# Altium PCB SCOPE.PcbDoc (part 2 of 4)
Units mil, origin at the board's own origin, x right, y up, seen from the top; angles counter-clockwise.
Board outline 7710 x 4000 mil, 2 copper layers (Top Layer, Bottom Layer); 219 components, 350 nets, 1637 pads, 359 vias.
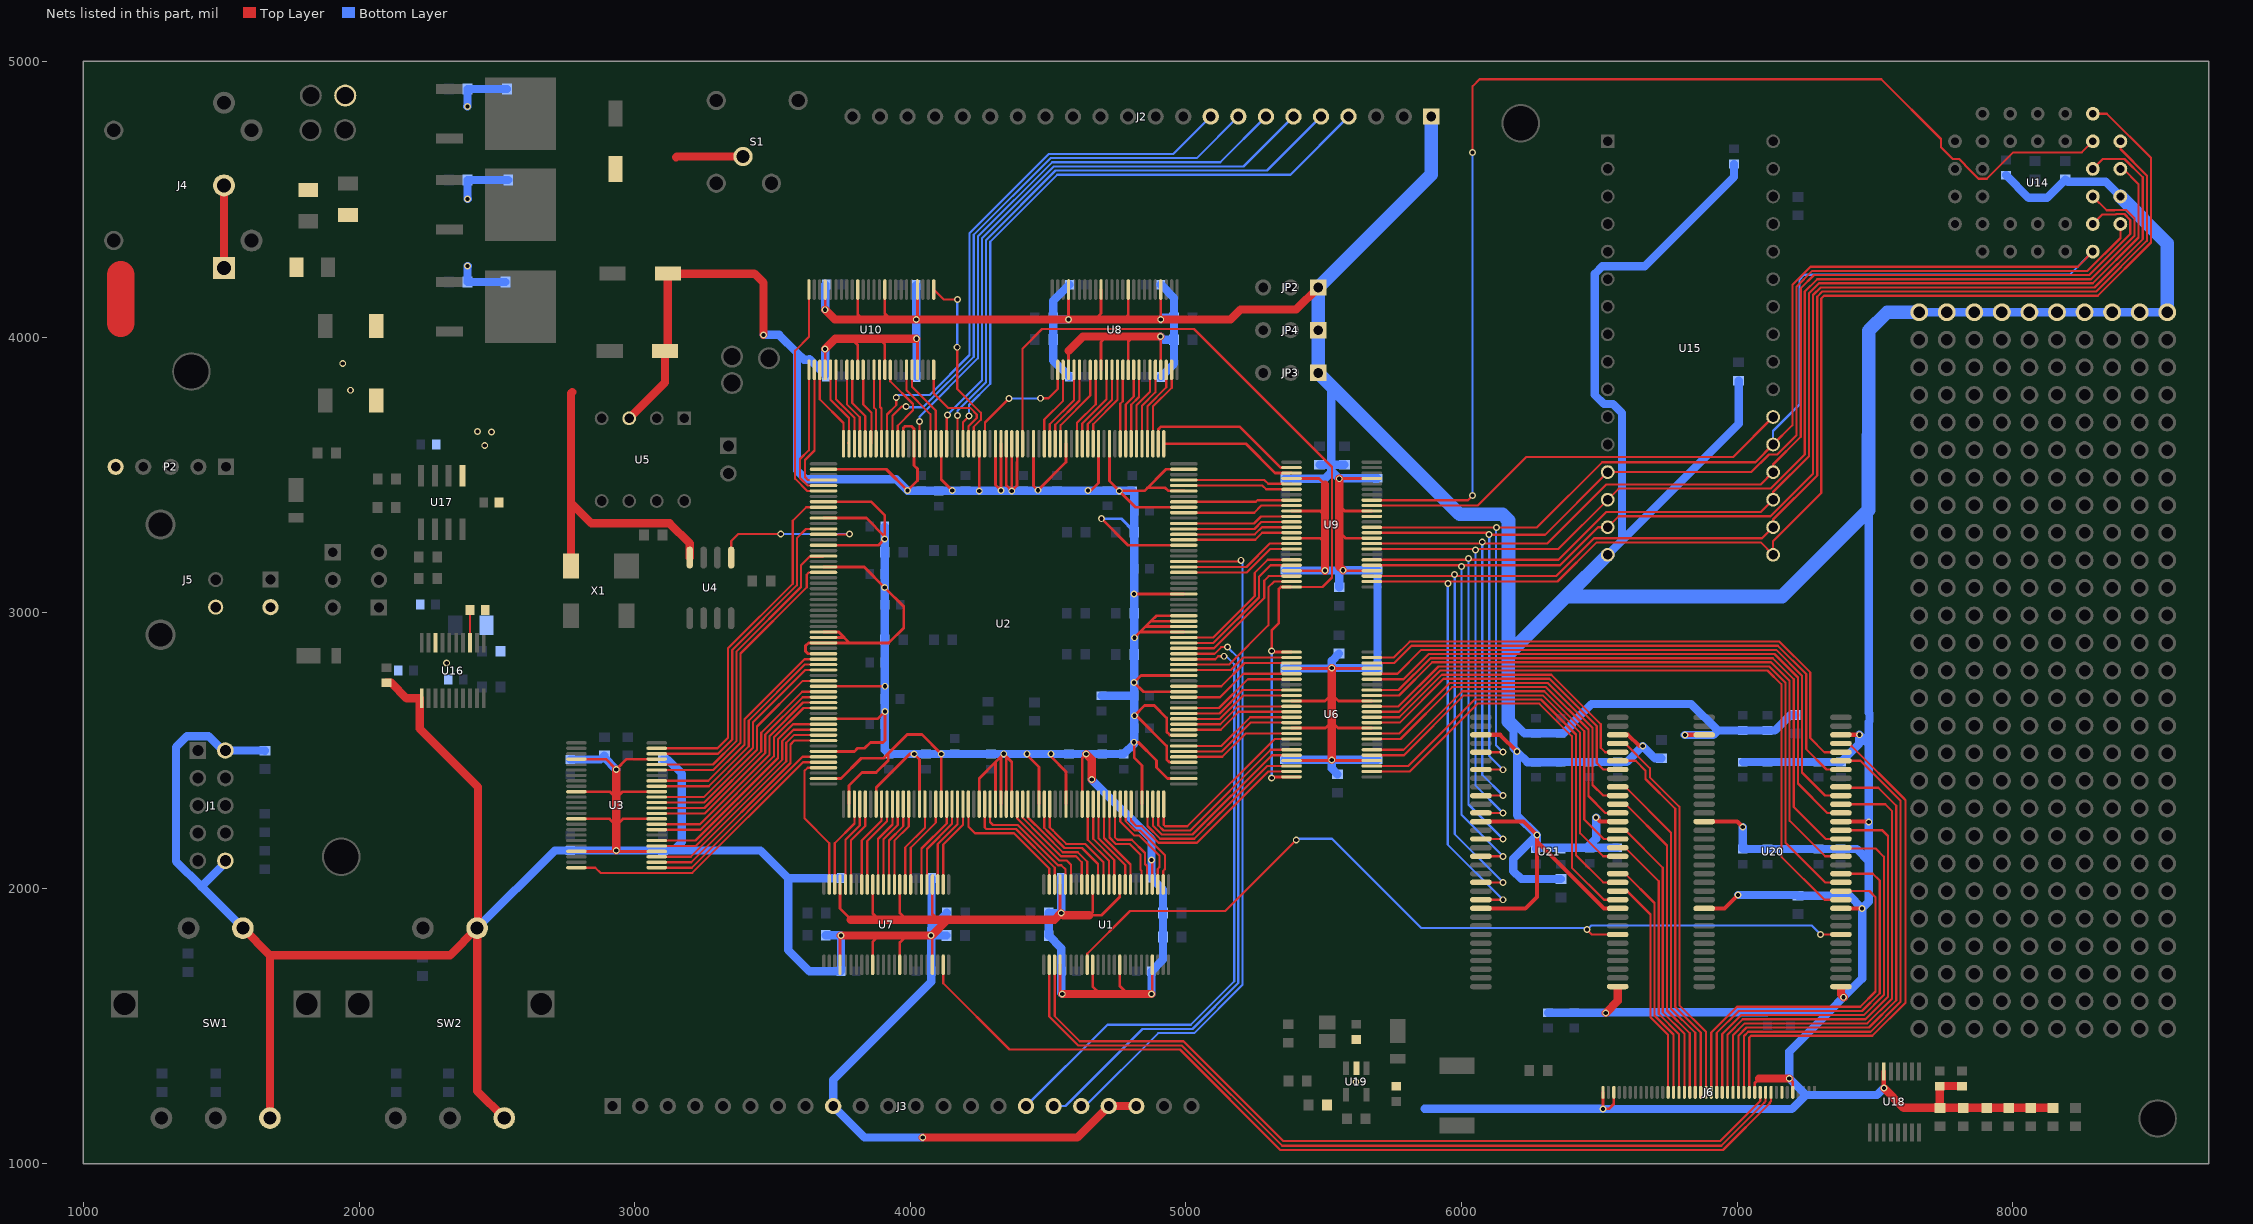
[diagram p2: the nets of this part, all layers, seen from the top]

## Via types
v1: diameter 25, hole 15, Top Layer to Bottom Layer, 359 vias

## Nets (pads, with @x,y where several pads share a name; then routed paths per layer and width w, separated by ;. In a path a pad name is that pad's centre, name@x,y a point inside that pad or via, vN(x,y) a via of type N, cw(c..) or ccw(c..) an arc to the next point about the centre after c; other vN are vias at no path point) (continued)
AGND: C1.2 C2.2 C3.2 C4.2 C5.2 C6.2 C7.2 C8.2 C9.2 C10.2 C11.2 C12.2 C13.2 C14.2 C15.2 C16.2 C17.2 C18.2 C19.2 C20.2 C21.2 C22.2 C23.2 C24.2 C25.2 C26.2 C27.2 C28.2 C29.2 C30.2 C31.2 C32.2 C33.2 C34.2 C35.2 C36.2 C37.2 C38.2 C39.2 C40.2 C41.2 C42.2 C43.2 C44.2 C45.2 C46.2 C47.2 C48.2 C49.2 C50.2 C51.2 C52.2 C53.2 C54.2 C55.2 C56.2 C57.2 C58.2 C59.2 C60.2 C61.2 C62.2 C63.2 C64.1 C65.1 C66.2 C67.2 C68.2 C70.2 C71.2 C72.2 C73.2 C74.2 C75.2 C76.2 C77.2 C78.2 C79.2 C80.2 C81.2 C82.2 C83.2 C84.2 C85.2 C86.2 C87.2 C88.2 C89.2 C90.2 C91.2 C92.2 C93.2 C94.2 C95.2 C96.2 C97.2 C98.2 C99.1 C100.2 J1.2 J1.10 J2.1 J3.9 J3.19 J3.20 J4.1 J4.3 J5.2 J6.1 J6.3 J6.29 J6.36 JP2.1 JP3.1 JP4.1 P1.2 P2.5 pad.0@7660,4090 pad.0@7760,4090 pad.0@7860,4090 pad.0@7960,4090 pad.0@8060,4090 pad.0@8160,4090 pad.0@8260,4090 pad.0@8360,4090 pad.0@8460,4090 pad.0@8560,4090 pad.1@1950,4876 pad.EndPad pad.StartPad R3.2 R4.2 R5.2 R6.2 R9.1 R12.2 R16.1 R18.1 R19.2 R20.2 R22.2 R23.2 R24.2 R25.2 R26.2 R27.2 R28.2 R29.2 R30.2 R31.1 R33.1 R34.1 R37.1 R46.1 R47.1 R48.1 R49.1 R50.2 R51.2 R60.1 R62.1 R63.1 R64.1 R65.1 R67.1 R68.1 R69.1 R70.2 R71.2 R72.2 R73.1 R74.2 R75.1 S1.3 SW1.2 SW1.5 SW2.2 SW2.5 U1.4 U1.10 U1.15 U1.21 U1.28 U1.34 U1.39 U1.45 U2.2 U2.8 U2.11 U2.16 U2.20 U2.32 U2.33 U2.34 U2.36 U2.42 U2.48 U2.54 U2.59 U2.62 U2.67 U2.75 U2.79 U2.86 U2.89 U2.90 U2.91 U2.92 U2.97 U2.102 U2.105 U2.116 U2.122 U2.125 U2.130 U2.138 U2.141 U2.149 U2.150 U2.151 U2.152 U2.156 U2.165 U2.172 U2.175 U2.179 U2.191 U2.193 U2.199 U2.205 U2.208 U2.209 U2.210 U2.211 U2.212 U2.215 U2.222 U2.227 U2.229 U3.4 U3.10 U3.15 U3.21 U3.28 U3.34 U3.39 U3.45 U4.4 U5.3 U6.4 U6.10 U6.15 U6.21 U6.28 U6.34 U6.39 U6.45 U7.4 U7.10 U7.15 U7.21 U7.28 U7.34 U7.39 U7.45 U8.4 U8.10 U8.15 U8.21 U8.28 U8.34 U8.39 U8.45 U9.4 U9.10 U9.15 U9.21 U9.28 U9.34 U9.39 U9.45 U10.4 U10.10 U10.15 U10.21 U10.28 U10.34 U10.39 U10.45 U14.16 U15.16 U16.1 U16.18 U17.5 U18.6 U19.2 U20.3 U20.13 U20.23 U20.33 U20.42 U20.52 U20.62 U21.3 U21.13 U21.23 U21.33 U21.42 U21.52 U21.62 X1.2 | length 70654.8
  Top Layer w10: U3.45@2788.66,2134.05 U3.4@3080,2134.05 ; U3.39@2788.66,2252.16 2908.84,2252.16 2933,2228 2957.16,2252.16 U3.10@3080,2252.16 ; U3.34@2788.66,2350.59 2909.41,2350.59 2933,2327 2956.59,2350.59 U3.15@3080,2350.59 ; U3.28@2788.66,2468.7 2895.3,2468.7 v1(2933,2431) 2970.7,2468.7 U3.21@3080,2468.7 ; U2.59@3685,2398.27 3748.27,2398.27 3822,2472 3903,2472 3989,2558 4042,2558 v1(4112.17,2487.83) U2.79@4112.17,2305.75 ; U2.54@3685,2496.69 3797.74,2496.69 3809.04,2508 3834.35,2508 3855.35,2529 3900,2529 3908,2537 v1(3908,2642) 3880.8,2614.8 U2.48@3685,2614.8 ; U2.42@3685,2732.91 v1(3907.91,2732.91) ; U2.36@3685,2851.02 3628.98,2851.02 3620,2860 3620,2880 3630.39,2890.39 U2.34@3685,2890.39 3779.61,2890.39 ; U2.33@3685,2910.08 3759.92,2910.08 ; U2.32@3685,2929.76 3740.24,2929.76 3779.61,2890.39 ; U2.20@3685,3165.98 3833.02,3165.98 v1(3907,3092) 3976,3023 3976,2945 3921.39,2890.39 3779.61,2890.39 ; U2.16@3685,3244.72 3884.72,3244.72 v1(3907,3267) ; U2.11@3685,3343.15 3840.85,3343.15 3907,3277 v1(3907,3267) ; U2.8@3685,3402.2 3858.44,3402.2 3907,3353.65 v1(3907,3267) ; U2.2@3685,3520.32 3912.68,3520.32 v1(3990,3443) 4026,3479 4026,3522 4013.74,3534.26 U2.227@4013.74,3612.83 4013.74,3667.26 4005,3676 3981,3676 3974.37,3669.37 U2.229@3974.37,3612.83 ; U10.4@3691,3881 v1(3691,3957) ; v1@3691.05,4099.06 U10.45@3691.05,4172.34 ; U7.28@3745.3,1722.66 v1@3745.3,1829 ; U7.21@3745.3,2014 3745.3,1926.7 3785,1887 ; U2.62@3777.52,2305.75 3777.52,2372.52 3825,2420 3876,2420 3920,2464 3920,2489 ; 3787,3994 3809.16,3971.84 U10.10@3809.16,3881 ; 3809.16,4082.16 U10.39@3809.16,4172.34 ; 3809.84,4082.16 3828,4064 ; U7.34@3863.41,1722.66 3863.41,1805.41 3886.5,1828.5 ; U7.15@3863.41,2014 3863.41,1909.59 3886.5,1886.5 ; U2.67@3875.95,2305.75 3875.95,2364.95 3998,2487 v1(4014,2487) 4033.43,2467.57 U2.75@4033.43,2305.75 ; 3887,3994 3907.59,3973.41 U10.15@3907.59,3881 ; U10.34@3907.59,4172.34 3907.59,4084.41 3928,4064 ; U7.39@3961.84,1722.66 3961.84,1803.84 3987,1829 ; U7.10@3961.84,2014 3961.84,1910.16 3986,1886 ; v1(4022,3994) 4025.7,3990.3 U10.21@4025.7,3881 ; v1@4023,4064 4025.7,4066.7 U10.28@4025.7,4172.34 ; v1(4075.56,1829) 4079.95,1824.61 U7.45@4079.95,1722.66 ; U7.4@4079.95,2014 4079.95,1907.06 4101,1886 ; U2.222@4112.17,3612.83 4112.17,3482.83 v1(4152,3443) ; U2.86@4249.96,2305.75 4249.96,2398.96 4309.02,2458.02 ; v1(4249.96,3442.04) U2.215@4249.96,3612.83 ; U2.89@4309.02,2305.75 4309.02,2458.02 ; U2.212@4309.02,3612.83 4309.02,3462.98 v1(4328.7,3443.3) U2.211@4328.7,3612.83 ; U2.90@4328.7,2305.75 4328.7,2477 ; U2.91@4348.39,2305.75 4348.39,2478.61 v1(4339,2488) ; U2.210@4348.39,3612.83 4348.39,3461.75 v1(4368.07,3442.07) ; U2.92@4368.07,2305.75 4368.07,2458.93 v1(4339,2488) ; U2.209@4368.07,3612.83 v1(4368.07,3442.07) ; U2.208@4387.76,3612.83 4387.76,3547.77 4387,3547.02 4387,3461 v1(4368.07,3442.07) ; v1@4423.5,2483.5 4466.5,2440.5 U2.97@4466.5,2305.75 ; U2.205@4446.81,3612.83 4446.81,3460.19 v1(4463,3444) 4564.92,3545.92 U2.199@4564.92,3612.83 ; v1(4510,2488) 4510,2478 4564.92,2423.08 U2.102@4564.92,2305.75 ; U1.28@4543.3,1722.66 4543.3,1624.7 v1(4551,1617) ; U1.21@4543.3,2014 4543.3,1914.14 v1(4547.44,1910) ; U8.4@4574.06,3881 4574.06,3950.05 ; 4574.06,4078.95 U8.45@4574.06,4172.34 ; U2.105@4623.98,2305.75 4623.98,2472.98 v1(4638,2487) ; v1(4645,3443) 4655,3443 4683.03,3471.03 U2.193@4683.03,3612.83 ; U1.34@4661.41,1722.66 4661.41,1643.59 4687.5,1617.5 ; U1.15@4661.41,2014 4661.41,1914.41 4649.5,1902.5 4694.5,1902.5 4759.84,1967.84 U1.10@4759.84,2014 ; 4671,4064 4692.16,4085.16 U8.39@4692.16,4172.34 ; U8.10@4692.16,3881 4692.16,3982.16 4712,4002 ; v1(4693,3341) 4789.28,3244.72 U2.165@4992.09,3244.72 ; U2.191@4722.4,3612.83 4722.4,3477.6 v1(4758,3442) ; U1.39@4759.84,1722.66 4759.84,1646.16 4786.5,1619.5 ; 4775,4064 4790.59,4079.59 U8.34@4790.59,4172.34 ; U8.15@4790.59,3881 4790.59,3983.59 4809,4002 ; v1@4812.44,3067.56 U2.156@4992.09,3067.56 ; v1(4813,2909) 4833.76,2929.76 ; U2.116@4840.51,2305.75 4840.51,2445.49 4812,2474 v1(4812,2530) 4827,2530 4893,2464 4893,2438 4932.73,2398.27 U2.122@4992.09,2398.27 ; 4853.45,2949.45 U2.150@4992.09,2949.45 ; v1(4875,2103) 4877.94,2100.05 U1.4@4877.94,2014 ; v1@4877.94,1617 U1.45@4877.94,1722.66 ; U8.21@4908.7,3881 v1@4908.7,4002 ; v1(4908.7,4064) U8.28@4908.7,4172.34 ; U2.125@4992.09,2457.32 4939.68,2457.32 4930,2467 4930,2517 4821,2626 v1(4813,2626) 4850,2663 4884.83,2663 4930.09,2617.75 4930.09,2568.02 4942.36,2555.75 U2.130@4992.09,2555.75 ; U2.138@4992.09,2713.23 4845.77,2713.23 v1(4812,2747) 4837.28,2772.28 U2.141@4992.09,2772.28 ; U2.149@4992.09,2929.76 4833.76,2929.76 ; U2.151@4992.09,2969.13 4873.13,2969.13 ; U2.152@4992.09,2988.82 4892.82,2988.82 4873.13,2969.13 ; U2.172@4992.09,3382.52 4817.48,3382.52 v1(4758,3442) ; U2.179@4992.09,3520.31 4927.31,3520.31 4849,3442 ; U2.175@4992.51,3442 4936,3442 4925,3453 4860,3453 4849,3442 ; U6.21@5383,2463.3 U6.28@5674.34,2463.3 ; U6.15@5383,2581.41 5506.41,2581.41 5529,2604 5551.59,2581.41 U6.34@5674.34,2581.41 ; U6.10@5383,2679.84 5504.84,2679.84 5529,2704 5553.16,2679.84 U6.39@5674.34,2679.84 ; U6.4@5383,2797.95 v1@5527.94,2797.95 ; U9.21@5383,3152.3 v1@5503.7,3152.3 ; U9.15@5383,3270.41 5485.59,3270.41 5504,3252 ; U9.10@5383,3368.84 5487.16,3368.84 5504,3352 ; U9.4@5383,3486.95 5482.06,3486.95 5504,3465 ; v1@5530.06,2797.95 U6.45@5674.34,2797.95 ; 5556,3293 5578.59,3270.41 U9.34@5674.34,3270.41 ; 5556,3389 5576.16,3368.84 U9.39@5674.34,3368.84 ; v1@5556.94,3486.95 U9.45@5674.34,3486.95 ; v1@5571.7,3152.3 U9.28@5674.34,3152.3 ; v1@6512.99,1199 J6.1@6512.99,1260 ; v1(6513,1200) 6534,1200 6552.36,1218.36 J6.3@6552.36,1260 ; J6.29@7063.47,1260 7063.47,1294.47 7079,1310 ; v1(7188.76,1310) 7201.26,1297.5 J6.36@7201.26,1260 ; 4309.02,2458.02 v1(4339,2488) ; v1(4758,3442) 4849,3442 ; 4833.76,2929.76 4873.13,2969.13
  Top Layer w15: U21.23@6070,1927.09 6231.09,1927.09 6273,1969 6273,2170 ; U21.13@6070,2242.05 6223.95,2242.05 v1(6273,2193) 6273,2170 ; U21.3@6070,2557.01 6139.99,2557.01 v1(6201,2496) ; v1(6488,2257) 6502.95,2242.05 U21.52@6566.06,2242.05 ; U21.42@6566.06,1927.09 6515.91,1927.09 6273,2170 ; U21.62@6566.06,2557.01 6579.99,2557.01 6604,2557 6645,2516 v1(6657,2516) ; v1@6811.01,2557.01 U20.3@6880,2557.01 ; U20.23@6880,1927.09 6954.09,1927.09 v1(7003,1976) ; U20.13@6880,2242.05 6999.95,2242.05 v1(7020,2222) ; U20.42@7376.06,1927.09 v1@7452.91,1927.09 ; U20.52@7376.06,2242.05 v1@7477,2242.05 ; U20.62@7376.06,2557.01 v1(7443,2557) ; v1@7531.61,1275.41 U18.6@7531.61,1336
  Top Layer w30: J4.1@1510,4250 J4.3@1510,4550 ; SW1.5@1578.43,1855.59 1676.85,1757.17 ; SW1.2@1676.85,1166.61 1676.85,1757.17 ; C57.2@2100,2745.44 2117,2745.44 2172.94,2689.5 2220,2689.5 2220,2580 2432,2368 SW2.5@2432,1855.59 ; SW2.2@2526.85,1166.61 2428.43,1265.04 SW2.5@2428.43,1855.59 2330,1757.17 1676.85,1757.17 ; X1.2@2769.21,3170 2769.21,3398 ; 2774,3801 2769.21,3796.21 2769.21,3398 ; v1(2933,2137) 2933,2228 2933,2327 v1(2933,2431) ; U5.3@2980,3705 3110.39,3835.39 C54.2@3110.39,3950 3120.39,3960 C25.2@3120.39,4230 3434,4230 3467,4197 v1(3467,4008) ; 3150,4652 3153,4655 S1.3@3393,4655 ; U4.4@3200,3200 3200,3250.98 3126.98,3324 2843.21,3324 2769.21,3398 ; v1(3691,3957) 3728,3994 3787,3994 3887,3994 v1(4022,3994) ; v1@3691.05,4099.06 v1(3691,4099) 3726,4064 3828,4064 3908,4064 ; v1(3748,1829) 3987,1829 v1(4075.56,1829) 4078,1829 4135,1886 ; 3784,1886 3986,1886 4101,1886 4135,1886 ; 3907.59,4064.41 3908,4064 ; v1@4023,4064 v1(4021.56,4064) 3928,4064 3908,4064 ; v1@4025.7,4064 v1(4574,4064) 4671,4064 4775,4064 v1(4908.7,4064) 5162,4064 5198,4100 5400,4100 JP2.1@5480,4180 ; v1(4045,1096) 4606,1096 J3.19@4720,1210 J3.20@4820,1210 ; v1(4551,1617) v1(4874.56,1617) ; 4574.06,3950.05 4626,4002 4712,4002 4809,4002 v1(4908,4002) ; v1(4638,2487) 4658,2467 v1(4658,2395.44) ; 4649.5,1902.5 4554.94,1902.5 v1(4547.44,1910) 4523.44,1886 4135,1886 ; 5503.59,3270.41 5504,3270 ; v1@5504,3152 v1(5504,3153.44) 5504,3252 5504,3270 ; 5504,3465 5504,3352 5504,3270 ; v1@5527.94,2797.95 v1(5529,2799) ; v1(5529,2466) 5529,2604 5529,2704 v1(5529,2799) ; v1@5530.06,2797.95 v1(5529,2799) ; 5556.84,3368.84 5556,3368 ; v1@5556.94,3486.95 v1(5556,3486) 5556,3389 5556,3368 ; v1(5570,3154) 5556,3168 5556,3293 5556,3368 ; v1(6523,1548) 6566.06,1591.06 U21.33@6566.06,1638 ; 7079,1310 v1(7188.76,1310) ; U20.33@7376.06,1635 7376.06,1614.94 v1(7386,1605) ; v1(7532,1275) 7603.56,1203.46 R50.2@7735,1203.46 ; C66.2@7815,1282.44 C67.2@7735,1282.44 R50.2@7735,1203.46 ; R49.1@8145,1203.46 R48.1@8065,1203.46 R47.1@7985,1203.46 R46.1@7905,1203.46 R51.2@7820,1203.46 R50.2@7735,1203.46
  Top Layer w100: 1136,4051 1136,4225
  Bottom Layer w10: v1(4693,3341) 4765.05,3341 R67.1@4812.44,3293.61
  Bottom Layer w30: J1.10@1515,2100 1515,2092.98 1428.02,2006 ; SW1.5@1578.43,1855.59 1428.02,2006 ; R9.1@1659,2499.46 1658.46,2500 J1.2@1515,2500 1506.11,2500 1454.11,2552 1375.89,2552 1336,2512.11 1336,2098.02 1428.02,2006 ; v1(2393,4836) 2393.46,4836.46 R31.1@2393.46,4900 R28.2@2536.54,4900 ; v1(2394,4258) 2393.46,4257.46 R75.1@2393.46,4200 R74.2@2531.54,4200 ; v1(2394,4501) 2393.46,4501.54 R73.1@2393.46,4570 R72.2@2541.54,4570 ; SW2.5@2428.43,1855.59 2710.28,2137.44 C33.2@2766,2137.44 C32.2@3103,2137.44 3140,2137.44 ; C30.2@2766,2467.56 2876.02,2467.56 R12.2@2890,2481.54 2890,2474 v1(2933,2431) ; C31.2@3103,2467.56 3119.44,2467.56 3171,2416 3171,2168.44 3140,2137.44 ; v1(3467,4008) 3524,4008 3589,3943 ; v1(3691,3957) 3691,3863.44 3634,3920.44 3634,3917.9 3614.1,3917.9 3589,3943 ; v1(3691,4099) C34.2@3691,4191 ; R22.2@3693.46,1830 v1@3748,1830 ; v1@3748.44,1829 C26.2@3748.44,1699 3634,1699 3557,1776 3557,2037 ; C28.2@3749.44,2037 3557,2037 ; C19.2@3907.56,3313 C8.2@3907.56,3140 C18.2@3907.56,2819 3907.56,2502 C7.2@3922,2487.56 C11.2@4057,2487.56 C10.2@4293,2487.56 C13.2@4576,2487.56 C6.2@4774,2487.56 v1@4812.44,2526 ; v1@3990,3442.44 C22.2@4040,3442.44 C21.2@4410,3442.44 C23.2@4532,3442.44 C16.2@4805,3442.44 4812.44,3435 C17.2@4812.44,3370 R67.1@4812.44,3293.61 ; v1(3990,3443) 3949,3484 3621,3484 3589,3516 3589,3943 ; C35.2@4021.56,4189 v1(4021.56,4064) 4021.56,3994.44 v1(4022,3994) 4022,3855.56 C36.2@4022.56,3855 ; v1(4045,1096) 3834,1096 J3.9@3720,1210 3720,1305.09 4075.56,1660.65 C27.2@4075.56,1699 v1(4075.56,1829) ; C29.2@4076.56,2037 4076.56,1855.02 ; R20.2@4131.54,1829 v1(4075.56,1829) ; R19.2@4132.54,1911 4076.56,1855.02 ; C50.2@4547.44,2038 v1(4547.44,1910) 4503.46,1910 R5.2@4502.46,1911 R6.2@4502.46,1828 4547.44,1783.02 C53.2@4547.44,1699 4547.44,1620.56 v1(4551,1617) ; v1(4574,4064) 4524.46,4064 R23.2@4518.46,4070 ; C41.2@4577.44,3856 4518.46,3914.98 R23.2@4518.46,4070 ; C38.2@4577.44,4190 4577,4190 4518.46,4131.46 R23.2@4518.46,4070 ; v1(4658,2395.44) 4874.56,2178.88 C51.2@4874.56,2038 4916.54,1996.02 R3.2@4916.54,1911 R4.2@4916.54,1823 4916.54,1740.98 C52.2@4874.56,1699 v1(4874.56,1617) ; C97.2@4694,2698.56 4811,2698.56 C14.2@4812.44,2700 ; v1@4812.44,2530 C9.2@4812.44,2581 C14.2@4812.44,2700 ; R67.1@4812.46,3292 R67.1@4812.46,3293.59 ; v1(4908,4002) 4920,3990 R24.2@4956.54,3990 ; C40.2@4908.56,3855 4956.54,3902.98 R24.2@4956.54,3990 ; C39.2@4908.56,4190 4956.54,4142.02 R25.2@4956.54,4070 ; v1(4908.7,4064) 4914.7,4070 R25.2@4956.54,4070 ; C49.2@5358,2466.44 v1@5529,2466.44 ; C46.2@5360,2797.56 5527.56,2797.56 v1(5529,2799) ; C45.2@5360,3153.44 5569.44,3153.44 v1(5570,3154) 5694.44,3154 C44.2@5695,3153.44 C47.2@5695,2797.56 5693.56,2799 v1(5529,2799) ; C42.2@5360,3486.56 5360.56,3486 5504,3486 5527,3509 5527,3515 ; JP3.1@5480,3870 5527,3823 5527,3536.54 ; R29.2@5485,3536.54 5527,3536.54 ; R18.1@5550,2413.46 5529,2434.46 v1(5529,2466) 5694.56,2466 C48.2@5695,2466.44 ; R16.1@5555,2851.54 5529,2825.54 v1(5529,2799) ; R30.2@5556,3092.46 5556,3153 ; R27.2@5575,3536.54 5527,3536.54 ; C43.2@5695,3487.56 5557.56,3487.56 v1(5556,3486) 5527,3515 ; 5865,1200 v1(6513,1200) ; 6188,2587 6188,2509 v1(6201,2496) v1@6201,2494.96 ; 6188,2602.23 6227.79,2562.44 pad.StartPad@6270,2562.44 C94.2@6360,2562.44 6369.46,2562.44 6399.72,2592.7 6399.72,2597.72 6471,2669 6833,2669 6929.56,2572.44 ; C89.2@6270,2143.56 6273,2146.56 v1(6273,2193) ; C89.2@6275,2147.56 C86.2@6455.54,2147.56 ; C87.2@6313,1548.56 C88.2@6409,1548.56 6522.44,1548.56 v1(6523,1548) 6525.5,1550.5 7105.94,1550.5 C75.2@7111,1555.56 7191,1555.56 C76.2@7192,1556.56 7337.56,1556.56 ; R71.2@6360,2033.46 6216.54,2033.46 6187,2063 6187,2107 v1(6273,2193) ; C92.2@6360,2457.56 C91.2@6270,2457.56 6238.4,2457.56 v1@6201,2494.96 ; C92.2@6361.02,2458.58 C81.2@6566.06,2458.58 6599.58,2458.58 v1(6657,2516) 6701.46,2471.54 R69.1@6725,2471.54 ; v1(6488,2257) 6488,2180.02 C86.2@6455.54,2147.56 ; v1@6513,1199 7197.76,1199 7248.76,1250 ; U15.16@6530,3210 6582,3262 ; C85.2@6565,2147.56 C86.2@6455.54,2147.56 ; v1(6810,2556) 6913.12,2556 6929.56,2572.44 ; C55.2@6988,4627.44 6988,4580.44 6664.56,4257 6510.53,4257 6483,4229.47 6483,3790.53 6516.53,3757 6549.47,3757 6582,3724.47 6582,3262 ; v1(7003,1976) 7217.46,1976 R70.2@7220,1973.46 7406.54,1973.46 v1(7453,1927) ; pad.StartPad@7005,3841.54 7005,3685 6582,3262 ; v1(7020,2222) C77.2@7020,2142.56 C78.2@7110,2142.56 C74.2@7295,2142.56 C73.2@7375,2142.56 7433.9,2142.56 7477,2099.46 ; C79.2@7021.02,2458.58 C71.2@7376.06,2458.58 7443,2525.52 v1(7443,2557) 7477,2523 ; R68.1@7210,2628.46 7192.46,2628.46 7136.44,2572.44 C84.2@7110,2572.44 C83.2@7020,2572.44 6929.56,2572.44 ; 7477,3544 7477,2636.79 7479.5,2634.29 7479.5,2605.71 7477,2603.21 7477,2523 ; v1(7532,1275) 7507,1250 7248.76,1250 ; pad.0@7660,4090 pad.0@7760,4090 pad.0@7860,4090 pad.0@7960,4090 pad.0@8060,4090 pad.0@8160,4090 pad.0@8260,4090 pad.0@8360,4090 pad.0@8460,4090 pad.0@8560,4090 ; C56.2@7975,4587.44 8057.44,4505 8123.46,4505 R33.1@8190,4571.54 8198.54,4563 8337,4563 U14.16@8390,4510 ; 3140,2137.44 3456.56,2137.44 3557,2037 ; v1(4075.56,1829) 4075.56,1854.02 4076.56,1855.02 ; C14.2@4812.44,2700 C15.2@4812.44,3159 R67.1@4812.44,3293.61 ; R24.2@4956.54,3990 R25.2@4956.54,4070 ; 5527,3515 5527,3536.54 ; v1@6201,2494.96 6201,2265 v1(6273,2193) ; 7248.76,1250 v1(7188.76,1310) 7188.76,1407.76 7337.56,1556.56 ; 7337.56,1556.56 v1(7386,1605) 7453,1672 v1(7453,1927) ; v1(7453,1927) 7477,1951 7477,2099.46 ; 7477,2099.46 7477,2523
  Bottom Layer w50: J2.1@5890,4800 5890,4590 JP2.1@5480,4180 JP4.1@5480,4025 JP3.1@5480,3870 5993,3357 6148,3357 6170.5,3334.5 6170.5,2850.5 6169.5,2849.5 ; 6188,2587 6169.5,2605.5 6169.5,2849.5 ; U15.16@6530,3210 6379,3059 ; 7476,3643 7476,3373 7162,3059 6379,3059 ; 7477,3529.47 7477,4023 7544,4090 pad.0@7660,4090 ; U14.16@8390,4510 8560,4340 pad.0@8560,4090 ; 6169.5,2849.5 6379,3059
  other v1: 5617,1297 7477,2241 4423,2488 2318,2818 4812,3068 2456,3607 2481,3656 2430,3657 1969,3807 1941,3904
B0: J6.21 U20.44 | length 1347.1
  Top Layer w8: J6.21@6905.99,1260 6905.99,1477.2 6998.79,1570 7446.51,1570 7501.89,1625.39 7501.89,1968.11 7479.92,1990.08 U20.44@7381.06,1990.08
B1: J6.22 U20.46 | length 1426.4
  Top Layer w8: J6.22@6925.67,1260 6925.67,1475.67 7005,1555 7452.72,1555 7516.89,1619.17 7516.89,2028.11 7491.93,2053.07 U20.46@7376.06,2053.07
B2: J6.23 U20.49 | length 1527
  Top Layer w8: J6.23@6945.36,1260 6945.36,1471.57 7013.79,1540 7458.93,1540 7531.89,1612.96 7531.89,2115 7501.89,2145 U20.49@7376.06,2145
B3: J6.24 U20.51 | length 1610.9
  Top Layer w8: J6.24@6965.04,1260 6965.04,1470.04 7020,1525 7465.15,1525 7546.89,1606.75 7546.89,2190 7526.89,2210 ; U20.51@7376.06,2210.55 7526.89,2210.55
B4: J6.25 U20.54 | length 1715.2
  Top Layer w8: J6.25@6984.73,1260 6984.73,1467.15 7027.57,1510 7471.36,1510 7561.89,1600.53 7561.89,2280 7536.89,2305 U20.54@7376.06,2305.04
B5: J6.26 U20.56 | length 1764.7
  Top Layer w8: J6.26@7004.41,1260 7004.41,1465.62 7033.79,1495 7477.57,1495 7576.89,1594.32 7576.89,2299.76 7511.66,2365 U20.56@7376.06,2365
B6: J6.27 U20.59 | length 1828.9
  Top Layer w8: J6.27@7024.1,1260 7024.1,1464.1 7040,1480 7483.79,1480 7591.89,1588.11 7591.89,2318.11 7447.48,2462.52 U20.59@7376.06,2462.52
B7: J6.28 U20.61 | length 1872.1
  Top Layer w8: J6.28@7043.78,1260 7043.78,1458.78 7050,1465 7490,1465 7610,1585 7610,2320 7606.89,2323.11 7606.89,2324.32 7415.7,2515.51 7413.57,2515.51 7403.57,2525.51 U20.61@7376.06,2525.51
CAS: U1.33 U20.39 U21.39 | length 3210.8
  Top Layer w8: U1.33@4641.73,1726.66 4641.73,1762.72 4797,1918 5143,1918 v1(5400,2175) ; v1(6455,1850) 6472.4,1832.6 U21.39@6566.06,1832.6 ; v1(7302.6,1832.6) U20.39@7376.06,1832.6
  Bottom Layer w8: v1@5405,2180 5530,2180 5853.9,1856.1 6448.9,1856.1 v1(6455,1850) 6470,1865 7270.2,1865 v1(7302.6,1832.6)
CS0: U9.41 U14.22 | length 4342.3
  Top Layer w8: U9.41@5674.34,3408.2 6023.2,3408.2 v1(6040,3425) ; v1(6040,4670) 6040,4910 6065,4935 7522.57,4935 7739,4718.57 7739,4688.88 7781.88,4646 7804.91,4646 7826,4624.91 7826,4623.09 7875.09,4574 7904.91,4574 8000.91,4670 8250,4670 U14.22@8290,4710
  Bottom Layer w8: v1(6040,3425) v1(6040,4670)
CS1: U9.40 U15.22 | length 1588.8
  Top Layer w8: U9.40@5674.34,3388.52 6058.52,3388.52 6235,3565 6985,3565 U15.22@7130,3710
CS2: U9.38
D0: U9.36 U14.13 U15.21 U21.5 | length 5976.6
  Top Layer w8: U9.36@5674.34,3309.78 5675.12,3309 v1(6126,3309) 6273,3309 6510,3546 7066,3546 U15.21@7130,3610 7200,3680 7200,4189 7266,4255 8235,4255 U14.13@8290,4310 ; U21.5@6070,2494.02 v1(6150,2494.02)
  Bottom Layer w8: v1@6125,3307 6125,2519.02 v1(6150,2494.02) ; U15.21@7130,3610 7130,3659.09 7226,3755.09 7226,4208.79 7243.46,4226.25 8206.25,4226.25 U14.13@8290,4310
D1: U9.35 U14.14 U15.13 U21.7 | length 4476.9
  Top Layer w8: U9.35@5674.34,3290.09 6092.9,3290.09 v1(6100,3283) 6303,3283 U15.13@6530,3510 7051.21,3510 7115.21,3574 7144.91,3574 7215,3644.09 7215,4182.79 7272.21,4240 8270.91,4240 8390,4359.09 U14.14@8390,4410 ; U21.7@6070,2431.02 6148.98,2431.02 v1(6150,2430)
  Bottom Layer w8: v1@6100,3275 6100,2480 v1(6150,2430)
D2: U9.33 U14.15 U15.20 U21.10 | length 4782.8
  Top Layer w8: U9.33@5681.5,3250.72 6310.73,3250.72 6525,3465 7085,3465 U15.20@7130,3510 7130,3537.88 7230,3637.88 7230,4176.57 7278.43,4225 8277.12,4225 8426,4373.88 8426,4424.91 8404.91,4446 8375.09,4446 8374.09,4445 8325,4445 U14.15@8290,4410 ; U21.10@6070,2336.54 v1(6150,2336.54)
  Bottom Layer w8: v1(6075,3256) 6075,2411.54 v1(6150,2336.54)
D3: U9.32 U14.17 U15.14 U21.12 | length 4906.5
  Top Layer w8: U9.32@5674.34,3231.04 6351.04,3231.04 U15.14@6530,3410 6570,3450 7120.91,3450 7245,3574.09 7245,4165 7290,4210 8283.34,4210 8441,4367.66 8441,4431.12 8411.12,4461 8368.88,4461 8367.88,4460 8340,4460 U14.17@8290,4510 ; U21.12@6070,2273.54 v1(6150,2273.54)
  Bottom Layer w8: v1(6050,3227) 6050,2373.54 v1(6150,2273.54)
D4: U9.30 U14.18 U15.19 U21.15 | length 5055.1
  Top Layer w8: U9.30@5674.34,3191.67 6351.67,3191.67 6525,3365 7085,3365 U15.19@7130,3410 7130,3437.88 7260,3567.88 7260,4158.79 7296.21,4195 8289.55,4195 8456,4361.45 8456,4554 8400,4610 U14.18@8390,4610 ; U21.15@6070,2179.06 v1(6150,2179.06)
  Bottom Layer w8: v1@6025,3192 6025,2304.06 v1(6150,2179.06)
  other v1: 6025,3197
D5: U9.29 U14.19 U15.15 U21.17 | length 5311.7
  Top Layer w8: U9.29@5674.34,3171.99 6356.98,3171.99 6495,3310 U15.15@6530,3310 6570,3350 7120.91,3350 7275,3504.09 7275,4152.57 7302.43,4180 8295.76,4180 8471,4355.24 8471,4579.91 8404.91,4646 8326,4646 U14.19@8290,4610 ; U21.17@6070,2116.06 v1(6150,2116.06)
  Bottom Layer w8: v1@6000,3171 6000,2266.06 v1(6150,2116.06)
  other v1: 6000,3168
D6: U9.27 U14.20 U15.18 U21.20 | length 5376
  Top Layer w8: U9.27@5674.34,3132.61 6342.61,3132.61 6480,3270 7090,3270 U15.18@7130,3310 7130,3337.88 7290,3497.88 7290,4146.36 7308.64,4165 8301.98,4165 8486,4349.02 8486,4586.12 8390,4682.12 U14.20@8390,4710 ; U21.20@6070,2021.57 v1(6150,2021.57)
  Bottom Layer w8: v1@5975,3132.61 5975,2196.57 v1(6150,2021.57)
  other v1: 5974,3138
D7: U9.26 U14.21 U15.17 U21.22 | length 5710.7
  Top Layer w8: U9.26@5681,3112.93 6347.93,3112.93 6490,3255 7085,3255 U15.17@7130,3210 7130,3259.09 7305,3434.09 7305,4140.15 7314.85,4150 8308.19,4150 8501,4342.81 8501,4649.91 8340.91,4810 U14.21@8290,4810 ; U21.22@6070,1958.58 v1(6150,1958.58)
  Bottom Layer w8: v1@5950,3112.93 5950,2158.58 v1(6150,1958.58)
  other v1: 5950,3106
D8: U6.26 U21.43 | length 1567.5
  Top Layer w8: U6.26@5674.34,2423.93 5811.93,2423.93 6058,2670 6281.51,2670 6400,2551.51 6400,2075 6516.42,1958.58 U21.43@6566.06,1958.58
D9: U6.27 U21.45 | length 1522.9
  Top Layer w8: U6.27@5674.34,2443.61 5806.61,2443.61 6048,2685 6287.72,2685 6415,2557.72 6415,2120 6513.43,2021.57 U21.45@6566.06,2021.57
D10: U6.29 U21.48 | length 1436.7
  Top Layer w8: U6.29@5674.34,2482.99 5791.2,2482.99 6008.21,2700 6293.93,2700 6430,2563.93 6430,2200 6513.94,2116.06 U21.48@6566.06,2116.06
D11: U6.30 U21.50 | length 1389.2
  Top Layer w8: U6.30@5674.34,2502.67 5789.67,2502.67 6002,2715 6300.15,2715 6445,2570.15 6445,2250 6515.94,2179.06 U21.50@6566.06,2179.06
D12: U6.32 U21.53 | length 1300
  Top Layer w8: U6.32@5674.34,2542.04 5778.04,2542.04 5966,2730 6306.36,2730 6460,2576.36 6460,2335 6521.46,2273.54 U21.53@6566.06,2273.54
D13: U6.33 U21.55 | length 1258.4
  Top Layer w8: U6.33@5674.34,2561.72 5773.73,2561.72 5957,2745 6312.57,2745 6475,2582.57 6475,2375 6513.46,2336.54 U21.55@6566.06,2336.54
D14: U6.35 U21.58 | length 1172.2
  Top Layer w8: U6.35@5674.34,2601.09 5775.73,2601.09 5934.64,2760 6318.79,2760 6490,2588.79 6490,2455 6513.98,2431.02 U21.58@6566.06,2431.02
D15: U6.36 U21.60 | length 1121.8
  Top Layer w8: U6.36@5674.34,2620.78 5774.21,2620.78 5928.43,2775 6325,2775 6505,2595 6505,2510 6520.98,2494.02 U21.60@6566.06,2494.02
D16: U6.37 U20.43 | length 2446.2
  Top Layer w8: U6.37@5702.34,2640.47 5772.68,2640.47 5922.21,2790 7110,2790 7160,2740 7160,2115 7316.42,1958.58 U20.43@7376.06,1958.58
D17: U6.38 U20.45 | length 2426.7
  Top Layer w8: U6.38@5674.34,2660.15 5771.15,2660.15 5916,2805 7116.21,2805 7175,2746.21 7175,2165 7318.43,2021.57 U20.45@7376.06,2021.57
D18: U6.40 U20.48 | length 2340.5
  Top Layer w8: U6.40@5674.34,2699.52 5772.73,2699.52 5893.21,2820 7122.43,2820 7190,2752.43 7190,2245 7318.94,2116.06 U20.48@7376.06,2116.06
D19: U6.41 U20.50 | length 2293
  Top Layer w8: U6.41@5674.34,2719.2 5771.2,2719.2 5887,2835 7128.64,2835 7205,2758.64 7205,2295 7320.94,2179.06 U20.50@7376.06,2179.06
D20: U6.43 U20.53 | length 2203.8
  Top Layer w8: U6.43@5674.34,2758.57 5789.36,2758.57 5880.79,2850 7134.85,2850 7220,2764.85 7220,2380 7326.46,2273.54 U20.53@7376.06,2273.54
D21: U6.44 U20.55 | length 2162.2
  Top Layer w8: U6.44@5674.34,2778.26 5767.26,2778.26 5854,2865 7141.07,2865 7235,2771.07 7235,2420 7318.46,2336.54 U20.55@7376.06,2336.54
D22: U6.46 U20.58 | length 2073
  Top Layer w8: U6.46@5674.34,2817.63 5755.84,2817.63 5818.21,2880 7147.28,2880 7250,2777.28 7250,2505 7323.98,2431.02 U20.58@7376.06,2431.02
D23: U6.47 U20.60 | length 2031.4
  Top Layer w8: U6.47@5674.34,2837.32 5754.31,2837.32 5812,2895 7153.49,2895 7265,2783.49 7265,2545 7315.98,2494.02 U20.60@7376.06,2494.02
DATA2: J2.4 U2.218 | length 2262.2
  Top Layer w8: U2.218@4190.91,3612.83 4190.91,3690.91 v1(4213,3713)
  Bottom Layer w8: v1(4213,3713) 4213,3753.57 4290,3830.57 4290,4345.93 4533.07,4589 5379,4589 J2.4@5590,4800
DATA3: J2.5 U2.219 | length 2182.8
  Top Layer w8: U2.219@4171.22,3612.83 v1(4171.22,3715.22)
  Bottom Layer w8: v1(4171.22,3715.22) 4171.22,3733.01 4275,3836.79 4275,4352.15 4526.85,4604 5294,4604 J2.5@5490,4800
DATA4: J2.6 U2.221 | length 2111.5
  Top Layer w8: U2.221@4131.85,3612.83 4131.85,3714.85 v1(4134.63,3717.63)
  Bottom Layer w8: v1(4134.63,3717.63) 4260,3843 4260,4358.36 4520.64,4619 5209,4619 J2.6@5390,4800
DATA5: J2.7 U2.226 | length 2064.7
  Top Layer w8: U2.226@4033.43,3612.83 v1(4033.43,3693.43)
  Bottom Layer w8: v1(4033.43,3693.43) 4033.43,3711 4245,3922.57 4245,4364.57 4514.43,4634 5124,4634 J2.7@5290,4800
DATA6: J2.8 U2.231 | length 2066.3
  Top Layer w8: U2.231@3935,3612.83 3935,3714 3969.25,3748.25 v1(3985,3748.25)
  Bottom Layer w8: v1@3985,3745 4046.21,3745 4230,3928.79 4230,4370.79 4508.21,4649 5039,4649 J2.8@5190,4800
DATA7: J2.9 U2.232 | length 2003.5
  Top Layer w8: U2.232@3915.32,3612.83 3915.32,3719.32 3949,3753 v1(3949,3780)
  Bottom Layer w8: v1(3949,3780) 3959,3790 4070,3790 4215,3935 4215,4377 4502,4664 4954,4664 J2.9@5090,4800
DCLK: J6.30 U1.27 | length 3029.6
  Top Layer w8: U1.27@4523.61,1726.66 4523.61,1536.38 4615,1445 4991,1445 5353,1083 6938,1083 7083.15,1228.15 J6.30@7083.15,1260
DE: J6.34
DEV_CLRN: J3.17 U2.145 | length 2258.6
  Top Layer w8: U2.145@4992.09,2851.02 5104.02,2851.02 5128,2875 v1(5151,2875)
  Bottom Layer w8: J3.17@4520,1210 4562.69,1210 4842.42,1489.73 5023.52,1489.73 5190,1656.21 5190,2836 v1(5151,2875)
DEV_OE: J3.16 U2.144 | length 2292.3
  Top Layer w8: U2.144@4992.09,2831.34 5106.22,2831.34 5116.88,2842 v1(5138,2842)
  Bottom Layer w8: J3.16@4420,1210 4715,1505 5017.57,1505 5175,1662.43 5175,2813 5146,2842 v1(5138,2842)
DISP: J6.31 U1.26 | length 3084.8
  Top Layer w8: U1.26@4503.93,1726.66 4503.93,1534.86 4608.79,1430 4984.79,1430 5348.79,1066 6942.21,1066 7098.15,1221.94 7098.15,1223.15 7102.84,1227.84 J6.31@7102.84,1260
G0: J6.13 U21.44 | length 825.9
  Top Layer w8: U21.44@6566.14,1990 U21.44@6566.06,1990.08 6599.92,1990.08 6685,1905 6685,1532.26 6749.21,1468.06 J6.13@6749.21,1260
G1: J6.14 U21.46 | length 893.2
  Top Layer w8: U21.46@6566.06,2053.07 6593.57,2053.07 6700,1946.64 6700,1538.48 6768.89,1469.59 J6.14@6768.89,1260
G2: J6.15 U21.49 | length 995.8
  Top Layer w8: U21.49@6566.06,2147.56 6593.57,2147.56 6715,2026.13 6715,1544.69 6788.58,1471.11 J6.15@6788.58,1260
G3: J6.16 U21.51 | length 1067.5
  Top Layer w8: U21.51@6566.06,2210.55 6566.62,2210 6595,2210 6730,2075 6730,1550.9 6808.26,1472.64 J6.16@6808.26,1260
G4: J6.17 U21.54 | length 1170.4
  Top Layer w8: U21.54@6566.06,2305.04 6594.96,2305.04 6745,2155 6745,1557.12 6827.95,1474.17 J6.17@6827.95,1260
G5: J6.18 U21.56 | length 1240.8
  Top Layer w8: U21.56@6566.06,2368.03 6593.57,2368.03 6760,2201.6 6760,1563.33 6847.63,1475.7 J6.18@6847.63,1260
G6: J6.19 U21.59 | length 1365.6
  Top Layer w8: U21.59@6566.06,2462.52 6631.48,2462.52 6667.36,2426.64 6667.36,2396.64 6775,2289 6775,1569.54 6867.32,1477.23 J6.19@6867.32,1260
G7: J6.20 U21.61 | length 1414.6
  Top Layer w8: U21.61@6566.06,2525.51 6593.57,2525.51 6683,2436.08 6683,2403 6790,2296 6790,1575.75 6887,1478.75 J6.20@6887,1260
HSYNC: J6.32 U7.47 | length 3427.7
  Top Layer w8: U7.47@4119.31,1722.66 4119.31,1655.68 4360,1415 4978.57,1415 5342.57,1051 6948.43,1051 7117.84,1220.41 7117.84,1222.84 7122.52,1227.52 J6.32@7122.52,1260
IO4: U2.4 U10.2 | length 474.8
  Top Layer w8: U10.2@3651.68,3881 3652,3880.68 3652,3588 3618,3554 3618,3492 3629.06,3480.94 U2.4@3685,3480.94
IO5: U2.5 U10.1 | length 501.9
  Top Layer w8: U10.1@3632,3881 3632,3589.21 3600,3557.21 3600,3488.79 3627.53,3461.26 U2.5@3685,3461.26
IO6: U2.6 U10.48 | length 828.7
  Top Layer w8: U10.48@3632,4172.34 3632,4000 3582,3950 3582,3485.57 3626,3441.57 U2.6@3685,3441.57
IO9: U2.9 U3.23 | length 1290.8
  Top Layer w8: U3.23@3080,2508.07 3300.45,2508.07 3338.86,2546.48 3338.86,2870.63 3573.5,3105.27 3573.5,3333.5 3622.52,3382.52 U2.9@3685,3382.52
IO13: U2.13 U3.22 | length 1233.1
  Top Layer w8: U3.22@3080,2488.39 3301.97,2488.39 3353.86,2540.27 3353.86,2864.41 3588.5,3099.05 3588.5,3270.5 3621.78,3303.78 U2.13@3685,3303.78
IO18: U2.18 U3.20 | length 1154.6
  Top Layer w8: U3.20@3080,2449.01 3283.82,2449.01 3368.86,2534.06 3368.86,2858.2 3603.5,3092.84 3603.5,3172.17 3633.9,3202.58 3682.22,3202.58 U2.18@3685,3205.35
IO21: U2.21 U3.19 | length 1118.7
  Top Layer w8: U3.19@3080,2429.33 3285.35,2429.33 3383.86,2527.85 3383.86,2851.99 3624,3092.13 3624,3138 3632.3,3146.3 U2.21@3685,3146.3
IO37: U2.37 U3.17 | length 842.1
  Top Layer w8: U3.17@3080,2389.96 3267.19,2389.96 3398.86,2521.63 3398.86,2614.29 3615.91,2831.34 U2.37@3685,2831.34
IO38: U2.38 U3.16 | length 842.1
  Top Layer w8: U3.16@3080,2370.28 3268.72,2370.28 3413.86,2515.42 3413.86,2608.07 3617.44,2811.65 U2.38@3685,2811.65
IO39: U2.39 U3.14 | length 850.3
  Top Layer w8: U3.14@3080,2330.91 3250.56,2330.91 3428.86,2509.21 3428.86,2601.86 3618.97,2791.97 U2.39@3685,2791.97
IO41: U2.41 U3.13 | length 837
  Top Layer w8: U3.13@3080,2311.22 3252.09,2311.22 3443.86,2502.99 3443.86,2586.86 3609.6,2752.6 U2.41@3685,2752.6
IO43: U2.43 U3.12 | length 819.3
  Top Layer w8: U3.12@3080,2291.53 3253.62,2291.53 3458.86,2496.78 3458.86,2564.35 3607.74,2713.23 U2.43@3685,2713.23
IO44: U2.44 U3.11 | length 819.3
  Top Layer w8: U3.11@3080,2271.85 3255.14,2271.85 3473.86,2490.57 3473.86,2558.14 3609.26,2693.54 U2.44@3685,2693.54
IO45: U2.45 U3.9 | length 827.4
  Top Layer w8: U3.9@3080,2232.48 3236.99,2232.48 3488.86,2484.35 3488.86,2551.93 3610.79,2673.86 U2.45@3685,2673.86
IO46: U2.46 U3.8 | length 827.4
  Top Layer w8: U3.8@3080,2212.8 3238.52,2212.8 3505,2479.28 3505,2546.85 3612.32,2654.17 U2.46@3685,2654.17
IO49: U2.49 U3.6 | length 819.3
  Top Layer w8: U3.6@3080,2173.43 3220.36,2173.43 3520,2473.07 3520,2540.64 3574.48,2595.12 U2.49@3685,2595.12
IO50: U2.50 U3.5 | length 819.3
  Top Layer w8: U3.5@3080,2153.74 3221.89,2153.74 3535,2466.85 3535,2534.43 3576.01,2575.43 U2.50@3685,2575.43
IO51: U2.51 U3.3 | length 827.4
  Top Layer w8: U3.3@3080,2114.37 3203.73,2114.37 3550,2460.64 3550,2528.21 3577.53,2555.75 U2.51@3685,2555.75
IO52: U2.52 U3.2 | length 827.4
  Top Layer w8: U3.2@3080,2094.68 3205.26,2094.68 3565,2454.43 3565,2522 3579.06,2536.06 U2.52@3685,2536.06
IO55: U2.55 U3.1 | length 771.5
  Top Layer w8: U3.1@3080,2075 3206.79,2075 3608.79,2477.01 U2.55@3685,2477.01
IO56: U2.56 U3.48 | length 1070.4
  Top Layer w8: U3.48@2788.66,2075 2857,2075 2876,2056 3209,2056 3610.32,2457.32 U2.56@3685,2457.32
IO57: U2.57 U7.23 | length 522.9
  Top Layer w8: U2.57@3685,2437.64 3627.64,2437.64 3616.21,2426.21 3616.21,2253.79 3706,2164 U7.23@3706,2014
IO63: U2.63 U7.22 | length 321.4
  Top Layer w8: U7.22@3725.61,2014 3725.61,2163.61 3797.2,2235.2 U2.63@3797.2,2305.75
IO64: U2.64 U7.20 | length 313.2
  Top Layer w8: U7.20@3764.99,2014 3764.99,2175.99 3816.89,2227.89 U2.64@3816.89,2305.75
IO65: U2.65 U7.19 | length 313.2
  Top Layer w8: U7.19@3784.67,2014 3784.67,2174.46 3836.57,2226.36 U2.65@3836.57,2305.75
IO68: U2.68 U7.17 | length 321.4
  Top Layer w8: U7.17@3824.04,2014 3824.04,2173.25 3895.63,2244.84 U2.68@3895.63,2305.75
IO69: U2.69 U7.16 | length 321.4
  Top Layer w8: U7.16@3843.72,2014 3843.72,2171.72 3915.32,2243.32 U2.69@3915.32,2305.75
IO70: U2.70 U7.14 | length 313.2
  Top Layer w8: U7.14@3883.09,2014 3883.09,2179.31 3935,2231.21 U2.70@3935,2305.75
IO71: U2.71 U7.13 | length 313.2
  Top Layer w8: U7.13@3902.78,2014 3902.78,2177.78 3954.69,2229.69 U2.71@3954.69,2305.75
IO72: U2.72 U7.12 | length 313.2
  Top Layer w8: U7.12@3922.47,2014 3922.47,2173.68 3974.37,2225.58 U2.72@3974.37,2305.75
IO73: U2.73 U7.11 | length 313.2
  Top Layer w8: U7.11@3942.15,2014 3942.15,2172.15 3994.06,2224.06 U2.73@3994.06,2305.75
IO76: U2.76 U7.9 | length 321.4
  Top Layer w8: U7.9@3981.52,2014 3981.52,2148.52 4053.11,2220.11 U2.76@4053.11,2305.75
IO78: U2.78 U7.8 | length 329.6
  Top Layer w8: U7.8@4001.2,2014 4001.2,2146.99 4092.48,2238.27 U2.78@4092.48,2305.75
IO80: U2.80 U7.6 | length 329.6
  Top Layer w8: U7.6@4040.57,2014 4040.57,2144.21 4131.85,2235.49 U2.80@4131.85,2305.75
IO81: U2.81 U7.5 | length 329.6
  Top Layer w8: U7.5@4060.26,2014 4060.26,2142.69 4151.54,2233.96 U2.81@4151.54,2305.75
IO82: U2.82 U7.3 | length 321.4
  Top Layer w8: U7.3@4099.63,2014 4099.63,2160.84 4171.22,2232.43 U2.82@4171.22,2305.75
IO83: U2.83 U7.2 | length 321.4
  Top Layer w8: U7.2@4119.31,2014 4119.31,2159.32 4190.91,2230.91 U2.83@4190.91,2305.75
IO84: U1.23 U2.84 | length 491.8
  Top Layer w8: U2.84@4210.59,2305.75 4210.59,2224.41 4235,2200 4376,2200 4503.93,2072.07 U1.23@4503.93,2018
IO87: U1.22 U2.87 | length 456.3
  Top Layer w8: U2.87@4269.65,2305.75 4269.65,2220.35 4275,2215 4383.21,2215 4523.61,2074.6 U1.22@4523.61,2018
IO88: U1.20 U2.88 | length 460.8
  Top Layer w8: U2.88@4289.33,2305.75 4289.33,2240.67 4300,2230 4390,2230 4536,2084 4548,2084 4562.98,2069.01 U1.20@4562.98,2018
IO93: U1.19 U2.93 | length 384.2
  Top Layer w8: U2.93@4387.76,2305.75 4387.76,2253.46 4540.21,2101 4567,2101 4582.67,2085.33 U1.19@4582.67,2018
IO94: U1.17 U2.94 | length 408.2
  Top Layer w8: U2.94@4407.44,2305.75 4407.44,2255.77 4471.5,2191.71 4471.5,2191.63 4546.91,2116.21 4547,2116.21 4547.21,2116 4601,2116 4622.04,2094.96 U1.17@4622.04,2018
IO95: U1.16 U2.95 | length 408.2
  Top Layer w8: U2.95@4427.13,2305.75 4427.13,2257.3 4486.5,2197.93 4486.5,2197.84 4553.13,2131.21 4553.21,2131.21 4553.43,2131 4607.21,2131 4641.73,2096.49 U1.16@4641.73,2018
IO98: U1.14 U2.98 | length 405.7
  Top Layer w8: U2.98@4486.18,2305.75 4486.18,2219.46 4501.5,2204.14 4501.5,2204.05 4559.34,2146.21 4622.79,2146.21 4681.1,2087.91 U1.14@4681.1,2018
IO99: U1.13 U2.99 | length 408.5
  Top Layer w8: U2.99@4505.87,2305.75 4505.87,2220.99 4516.5,2210.35 4516.5,2210.27 4530.27,2196.5 4530.35,2196.5 4565.64,2161.21 4633.79,2161.21 4700.78,2094.22 U1.13@4700.78,2018
IO106: U1.12 U2.106 | length 319.6
  Top Layer w8: U2.106@4643.66,2305.75 4643.66,2176.34 4720.47,2099.53 U1.12@4720.47,2018
IO107: U1.11 U2.107 | length 319.6
  Top Layer w8: U2.107@4663.35,2305.75 4663.35,2179.65 4740.15,2102.85 U1.11@4740.15,2018
IO108: U1.9 U2.108 | length 327.7
  Top Layer w8: U2.108@4683.03,2305.75 4683.03,2181.18 4779.52,2084.69 U1.9@4779.52,2018
IO109: U1.8 U2.109 | length 327.7
  Top Layer w8: U2.109@4702.72,2305.75 4702.72,2182.71 4799,2086.43 4799,2018.2 U1.8@4799.2,2018
IO110: U1.6 U2.110 | length 365.4
  Top Layer w8: U2.110@4722.4,2305.75 4722.4,2184.24 4745.64,2161 4796,2161 4835,2122 4835,2067 4838.57,2063.43 U1.6@4838.57,2018
IO111: U1.5 U2.111 | length 365.8
  Top Layer w8: U2.111@4742.09,2305.75 4742.09,2185.77 4751.85,2176 4803,2176 4851,2128 4851,2088 4858.26,2080.74 U1.5@4858.26,2018
IO112: U1.3 U2.112 | length 360
  Top Layer w8: U2.112@4761.77,2305.75 4761.77,2242.23 4812.72,2191.28 4831.03,2191.28 4904,2118.31 4904,2077 4897.63,2070.63 U1.3@4897.63,2018
IO113: U1.2 U2.113 | length 360.4
  Top Layer w8: U2.113@4781.46,2305.75 4781.46,2243.76 4815.42,2209.79 4833.94,2209.79 4924,2119.73 4924,2070 4917.31,2063.32 U1.2@4917.31,2018
IO114: U2.114 U6.23 | length 782.4
  Top Layer w8: U2.114@4800.46,2305.06 4800.46,2245.97 4820.7,2225.73 4839.27,2225.73 4900,2165 5040,2165 5298.93,2423.93 U6.23@5383,2423.93
IO117: U2.117 U6.22 | length 730.8
  Top Layer w8: U2.117@4860.2,2305.75 4860.2,2226.02 4906.21,2180 5030,2180 5125,2275 5126.21,2275 5294.83,2443.61 U6.22@5383,2443.61
IO118: U2.118 U6.20 | length 714.1
  Top Layer w8: U2.118@4879.88,2305.75 4879.88,2227.54 4912.43,2195 5023.79,2195 5311.77,2482.99 U6.20@5383,2482.99
IO119: U2.119 U6.19 | length 689.2
  Top Layer w8: U2.119@4899.57,2305.75 4899.57,2229.07 4918.64,2210 5015,2210 5307.67,2502.67 U6.19@5383,2502.67
IO120: U2.120 U6.17 | length 672.5
  Top Layer w8: U2.120@4919.25,2305.75 4919.25,2230.75 4925,2225 5005,2225 5322.04,2542.04 U6.17@5383,2542.04
IO126: U2.126 U6.16 | length 426
  Top Layer w8: U2.126@4992.09,2477.01 5132.01,2477.01 5216.73,2561.72 U6.16@5383,2561.72
IO127: U2.127 U6.14 | length 434.2
  Top Layer w8: U2.127@4992.09,2496.69 5129.91,2496.69 5234.31,2601.09 U6.14@5383,2601.09
IO128: U2.128 U6.13 | length 434.2
  Top Layer w8: U2.128@4992.09,2516.38 5128.38,2516.38 5232.78,2620.78 U6.13@5383,2620.78
IO131: U2.131 U6.12 | length 417.9
  Top Layer w8: U2.131@4992.09,2575.43 5126.29,2575.43 5191.32,2640.47 U6.12@5383,2640.47
IO132: U2.132 U6.11 | length 417.9
  Top Layer w8: U2.132@4992.09,2595.12 5124.76,2595.12 5189.79,2660.15 U6.11@5383,2660.15
IO133: U2.133 U6.9 | length 426
  Top Layer w8: U2.133@4992.09,2614.8 5123.23,2614.8 5207.95,2699.52 U6.9@5383,2699.52
IO134: U2.134 U6.8 | length 426
  Top Layer w8: U2.134@4992.09,2634.49 5121.7,2634.49 5206.42,2719.2 U6.8@5383,2719.2
IO135: U2.135 U6.6 | length 434.2
  Top Layer w8: U2.135@4992.09,2654.17 5120.17,2654.17 5224.57,2758.57 U6.6@5383,2758.57
IO137: U2.137 U6.5 | length 426
  Top Layer w8: U2.137@4992.09,2693.54 5123.54,2693.54 5208.26,2778.26 U6.5@5383,2778.26
IO139: U2.139 U6.3 | length 426
  Top Layer w8: U2.139@4992.09,2732.91 5127.91,2732.91 5212.63,2817.63 U6.3@5383,2817.63
IO142: U2.142 U6.2 | length 409.7
  Top Layer w8: U2.142@4992.09,2791.97 5161.97,2791.97 5207.31,2837.32 U6.2@5383,2837.32
IO143: U2.143 U9.23 | length 596.5
  Top Layer w8: U2.143@4992.09,2811.65 5156.65,2811.65 5299,2954 5299,3092 5319.93,3112.93 U9.23@5383,3112.93
IO146: U2.146 U9.22 | length 536.3
  Top Layer w8: U2.146@4992.09,2870.71 5101.71,2870.71 5284,3053 5284,3116 5300.61,3132.61 U9.22@5383,3132.61
IO147: U2.147 U9.20 | length 551.4
  Top Layer w8: U2.147@4992.09,2890.39 5100.18,2890.39 5265,3055.21 5265,3130 5306.98,3171.99 U9.20@5383,3171.99
IO148: U2.148 U9.19 | length 556.5
  Top Layer w8: U2.148@4992.09,2910.08 5098.65,2910.08 5249.39,3060.82 5249.39,3144.39 5296.67,3191.67 U9.19@5383,3191.67
IO160: U2.160 U9.17 | length 426
  Top Layer w8: U2.160@4992.09,3146.3 5221.3,3146.3 5306.04,3231.04 U9.17@5383,3231.04
IO161: U2.161 U9.16 | length 420.5
  Top Layer w8: U2.161@4992.09,3165.98 5219.68,3165.98 5304.43,3250.72 U9.16@5377.5,3250.72
IO166: U2.166 U9.14 | length 401.6
  Top Layer w8: U2.166@4992.09,3264.41 5251.41,3264.41 5277.1,3290.09 U9.14@5383,3290.09
IO167: U2.167 U9.13 | length 401.6
  Top Layer w8: U2.167@4992.09,3284.09 5249.88,3284.09 5275.57,3309.78 U9.13@5383,3309.78
IO168: U2.168 U9.12 | length 401.6
  Top Layer w8: U2.168@4992.09,3303.78 5248.35,3303.78 5274.04,3329.47 U9.12@5383,3329.47
IO169: U2.169 U9.11 | length 401.6
  Top Layer w8: U2.169@4992.09,3323.46 5246.82,3323.46 5272.51,3349.15 U9.11@5383,3349.15
IO171: U2.171 U9.9 | length 401.6
  Top Layer w8: U2.171@4992.09,3362.83 5247.83,3362.83 5273.52,3388.52 U9.9@5383,3388.52
IO173: U2.173 U9.8 | length 393.4
  Top Layer w8: U2.173@4992.09,3402.2 5253.2,3402.2 5259.2,3408.2 U9.8@5383,3408.2
IO176: U2.176 U9.6 | length 396.6
  Top Layer w8: U2.176@4992.09,3461.26 5277.26,3461.26 5290.94,3447.57 U9.6@5383,3447.57
IO177: U2.177 U9.5 | length 396.6
  Top Layer w8: U2.177@4992.09,3480.94 5285.06,3480.94 5298,3468 5382.26,3468 U9.5@5383,3467.26
IO181: U2.181 U9.3 | length 507.7
  Top Layer w10: U2.181@4919.25,3612.83 5217.17,3612.83 5323.37,3506.63 U9.3@5383,3506.63
IO182: U2.182 U9.2 | length 600.9
  Top Layer w10: U2.182@4899.57,3612.83 4899.57,3664.57 4909.83,3674.83 5194.17,3674.83 5342.69,3526.32 U9.2@5383,3526.32
IO183: U2.183 U8.23 | length 296.4
  Top Layer w8: U2.183@4879.88,3612.83 4879.88,3747.88 4948.07,3816.07 U8.23@4948.07,3881
IO184: U2.184 U8.22 | length 296.4
  Top Layer w8: U2.184@4860.2,3612.83 4860.2,3749.41 4928.39,3817.6 U8.22@4928.39,3881
IO185: U2.185 U8.20 | length 288.3
  Top Layer w8: U2.185@4840.51,3612.83 4840.51,3750.94 4889.02,3799.44 U8.20@4889.02,3881
IO186: U2.186 U8.19 | length 288.3
  Top Layer w8: U2.186@4820.83,3612.83 4820.83,3752.47 4869.33,3800.97 U8.19@4869.33,3881
IO187: U2.187 U8.17 | length 280.1
  Top Layer w8: U2.187@4801.14,3612.83 4801.14,3753.99 4829.96,3782.81 U8.17@4829.96,3881
IO188: U2.188 U8.16 | length 280.1
  Top Layer w8: U2.188@4781.46,3612.83 4781.46,3755.52 4810.27,3784.34 U8.16@4810.27,3881
IO189: U2.189 U8.14 | length 271.9
  Top Layer w8: U2.189@4761.77,3612.83 4761.77,3757.77 4770.9,3766.91 U8.14@4770.9,3881
IO194: U2.194 U8.13 | length 304.6
  Top Layer w8: U2.194@4663.35,3612.83 4663.35,3683.35 4751.22,3771.22 U8.13@4751.22,3881
IO195: U2.195 U8.12 | length 304.6
  Top Layer w8: U2.195@4643.66,3612.83 4643.66,3684.88 4731.53,3772.75 U8.12@4731.53,3881
IO196: U2.196 U8.11 | length 304.6
  Top Layer w8: U2.196@4623.98,3612.83 4623.98,3686.4 4711.85,3774.28 U8.11@4711.85,3881
IO197: U2.197 U8.9 | length 296.4
  Top Layer w8: U2.197@4604.29,3612.83 4604.29,3687.93 4672.48,3756.12 U8.9@4672.48,3881
IO200: U2.200 U8.8 | length 312.7
  Top Layer w8: U2.200@4545.24,3612.83 4545.24,3680.24 4652.8,3787.8 U8.8@4652.8,3881
IO201: U2.201 U8.6 | length 304.6
  Top Layer w8: U2.201@4525.55,3612.83 4525.55,3681.77 4613.43,3769.64 U8.6@4613.43,3881
IO202: U2.202 U8.5 | length 304.6
  Top Layer w8: U2.202@4505.87,3612.83 4505.87,3683.29 4593.74,3771.17 U8.5@4593.74,3881
IO203: U2.203 U8.3 | length 296.4
  Top Layer w8: U2.203@4486.18,3612.83 4486.18,3701.18 4554.37,3769.37 U8.3@4554.37,3881
IO207: U2.207 U6.1 U6.24 U9.24 | length 3183.9
  Top Layer w8: U2.207@4407.44,3612.83 4407.44,3958.44 4478,4029 4611,4029 5029.23,4029 5530,3528.23 5530,3128 5495.24,3093.24 U9.24@5383,3093.24
  Top Layer w10: v1@5311,2404.24 U6.24@5383,2404.24 U6.24@5411,2404.24 ; U9.24@5381,3093.24 5344.24,3093.24 5337,3086 5337,2962 5311,2936 v1(5311,2861) 5315,2857 U6.1@5383,2857
  Bottom Layer w10: v1(5311,2400) v1(5311,2861)
IO214: U2.214 U8.2 | length 461.1
  Top Layer w8: U2.214@4269.65,3612.83 4271,3614.19 4271,3690 v1(4358,3777) ; v1(4472,3778) 4501,3778 4534.69,3811.68 U8.2@4534.69,3881
  Bottom Layer w8: v1(4358,3777) 4471,3777 v1(4472,3778)
IO216: U2.216 U10.25 | length 676.8
  Top Layer w8: U10.25@4084.76,4172.34 4121.09,4136 v1(4171,4136) v1@4175,4140 ; v1(4170,3963) 4170,3811.21 4256,3725.21 4256,3699.79 4230.28,3674.06 U2.216@4230.28,3612.83
  Bottom Layer w8: v1(4170,3963) 4170,4135 v1(4171,4136)
IO217: U2.217 U10.24 | length 384.2
  Top Layer w8: U10.24@4085,3873 4085,3795 4137,3743 4217,3743 4241,3719 4241,3706 4210.59,3675.59 U2.217@4210.59,3612.83
IO223: U2.223 U10.20 | length 304
  Top Layer w8: U10.20@4006.01,3881 4006.01,3819.99 4092.48,3733.52 U2.223@4092.48,3612.83
IO224: U2.224 U10.19 | length 304
  Top Layer w8: U10.19@3986.33,3881 3986.33,3806.67 4072.8,3720.2 U2.224@4072.8,3612.84
IO230: U2.230 U10.16 | length 325.3
  Top Layer w8: U10.16@3927.28,3881 3927.28,3839.72 4010,3757 4010,3734 3954.69,3678.69 U2.230@3954.69,3612.83
IO233: U2.233 U10.14 | length 271.4
  Top Layer w8: U10.14@3887.91,3881 3890,3878.91 3890,3746 3895.63,3740.37 U2.233@3895.63,3612.83
IO234: U2.234 U10.13 | length 271.4
  Top Layer w8: U10.13@3868.22,3881 3868.22,3743.98 3875.94,3736.26 U2.234@3875.94,3612.83
IO235: U2.235 U10.11 | length 281.8
  Top Layer w8: U10.11@3828.85,3881 3828.85,3755.15 3859.04,3724.96 3859.04,3615.61 U2.235@3856.26,3612.83
IO236: U2.236 U10.9 | length 287.7
  Top Layer w8: U10.9@3789.48,3881 3789.48,3760.52 3836.57,3713.43 U2.236@3836.57,3612.83
IO237: U2.237 U10.8 | length 287.7
  Top Layer w8: U10.8@3769.8,3881 3769.8,3756.24 3816.89,3709.14 U2.237@3816.89,3612.83
IO238: U2.238 U10.6 | length 295.8
  Top Layer w8: U10.6@3730.43,3881 3730.43,3774.4 3797.2,3707.62 U2.238@3797.2,3612.83
IO239: U2.239 U10.5 | length 297.9
  Top Layer w8: U10.5@3710.74,3881 3710.74,3772.87 3777.52,3706.09 3777.52,3617.87 3775,3615.35 U2.239@3777.52,3612.83
IO240: U2.240 U10.3 | length 304
  Top Layer w8: U10.3@3671.37,3881 3671.37,3774.63 3757.83,3688.17 U2.240@3757.83,3612.83
NCEO: J3.18 U2.162 | length 2517.2
  Top Layer w8: U2.162@4992.09,3185.67 v1@5200,3185.67
  Bottom Layer w8: J3.18@4620,1210 4635,1210 4899.73,1474.73 5029.73,1474.73 5205,1650 5205,3185 v1(5200,3190)
NCSO: U2.14 U4.1 | length 574.8
  Top Layer w8: U4.1@3350,3200 3350,3260 3375,3285 v1(3530,3285) ; U2.14@3705.91,3284.09 3779.09,3284.09 v1(3780,3285)
  Bottom Layer w8: v1(3530,3285) v1(3780,3285)
NetC59_1: C59.1 U16.13 | length 119.5
  Top Layer w8: C59.1@2402.44,3010 2402.44,2890.56 U16.13@2402.5,2890.5